# Altium PCB FLYBACK 220-24V.PcbDoc
Units mm, origin at the board's own origin, x right, y up, seen from the top; angles counter-clockwise.
Board outline 121.79 x 85.72 mm, 2 copper layers (Top Layer, Bottom Layer); 43 components, 29 nets, 113 pads, 0 vias.
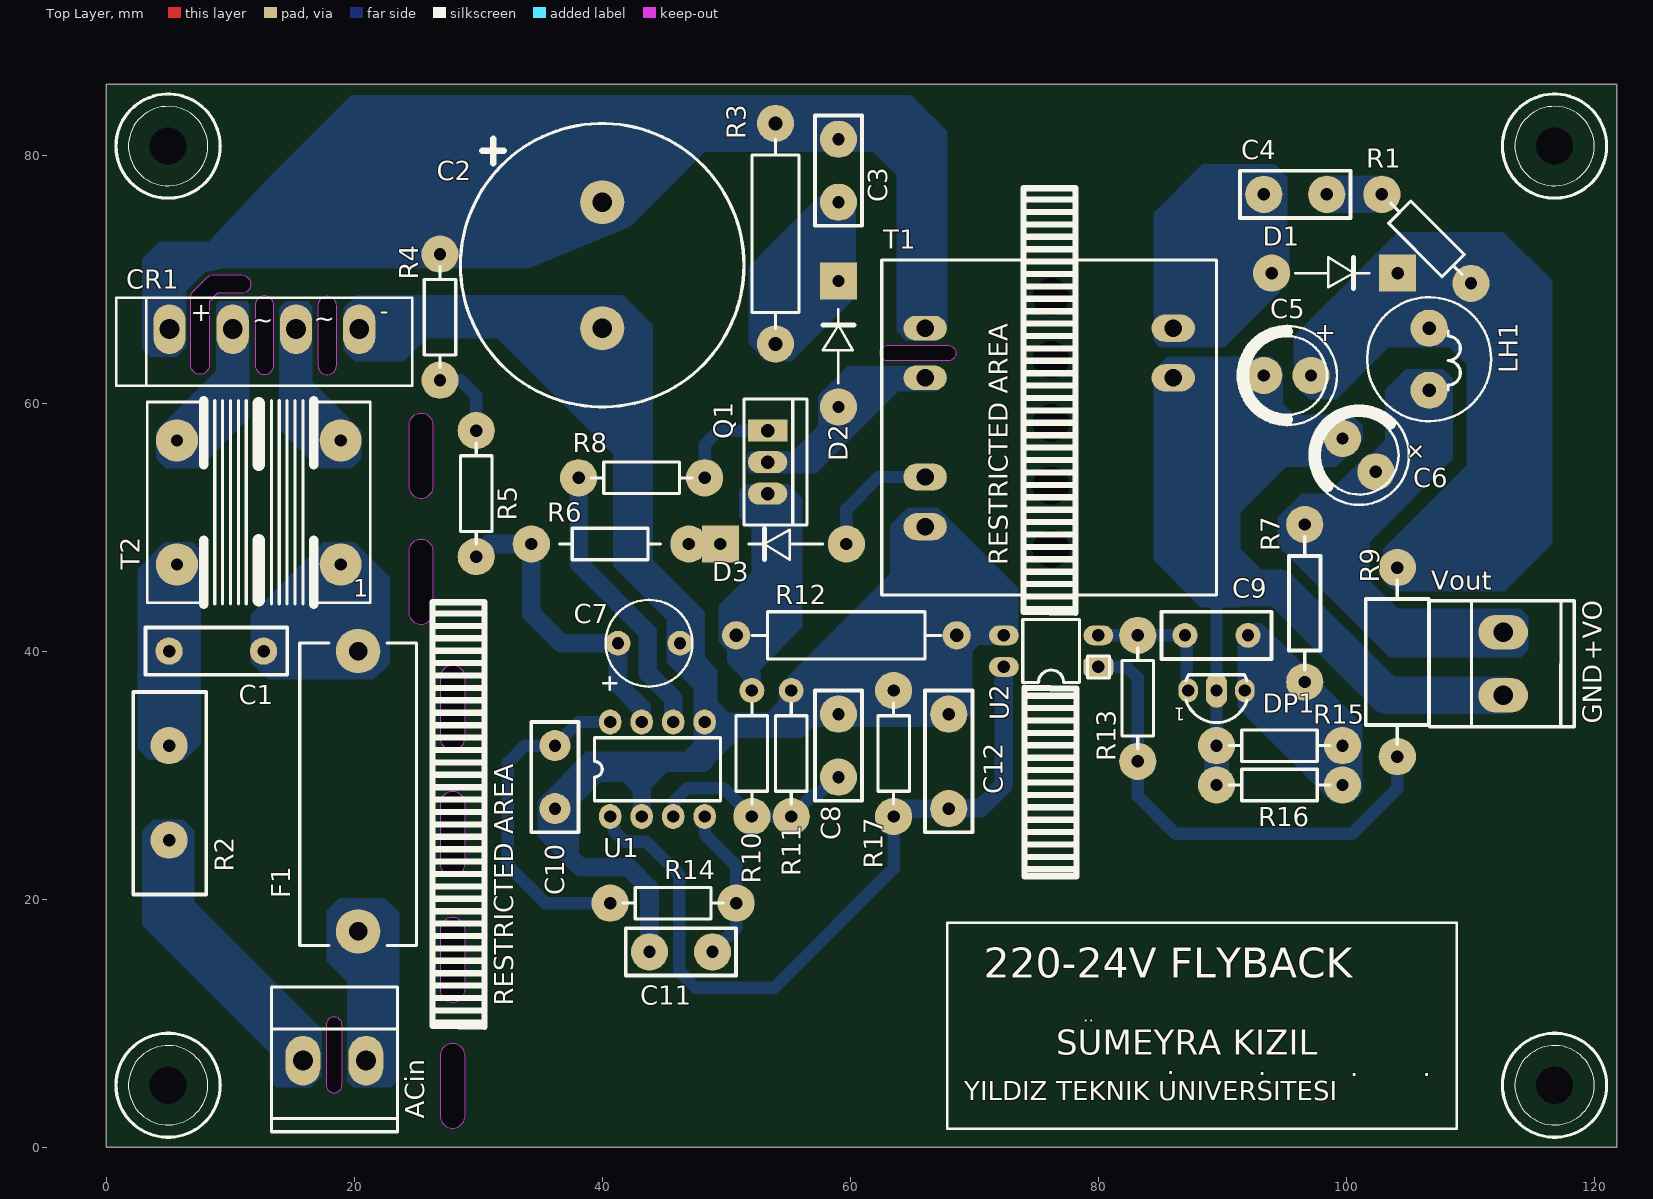
[diagram p0: Top Layer view]
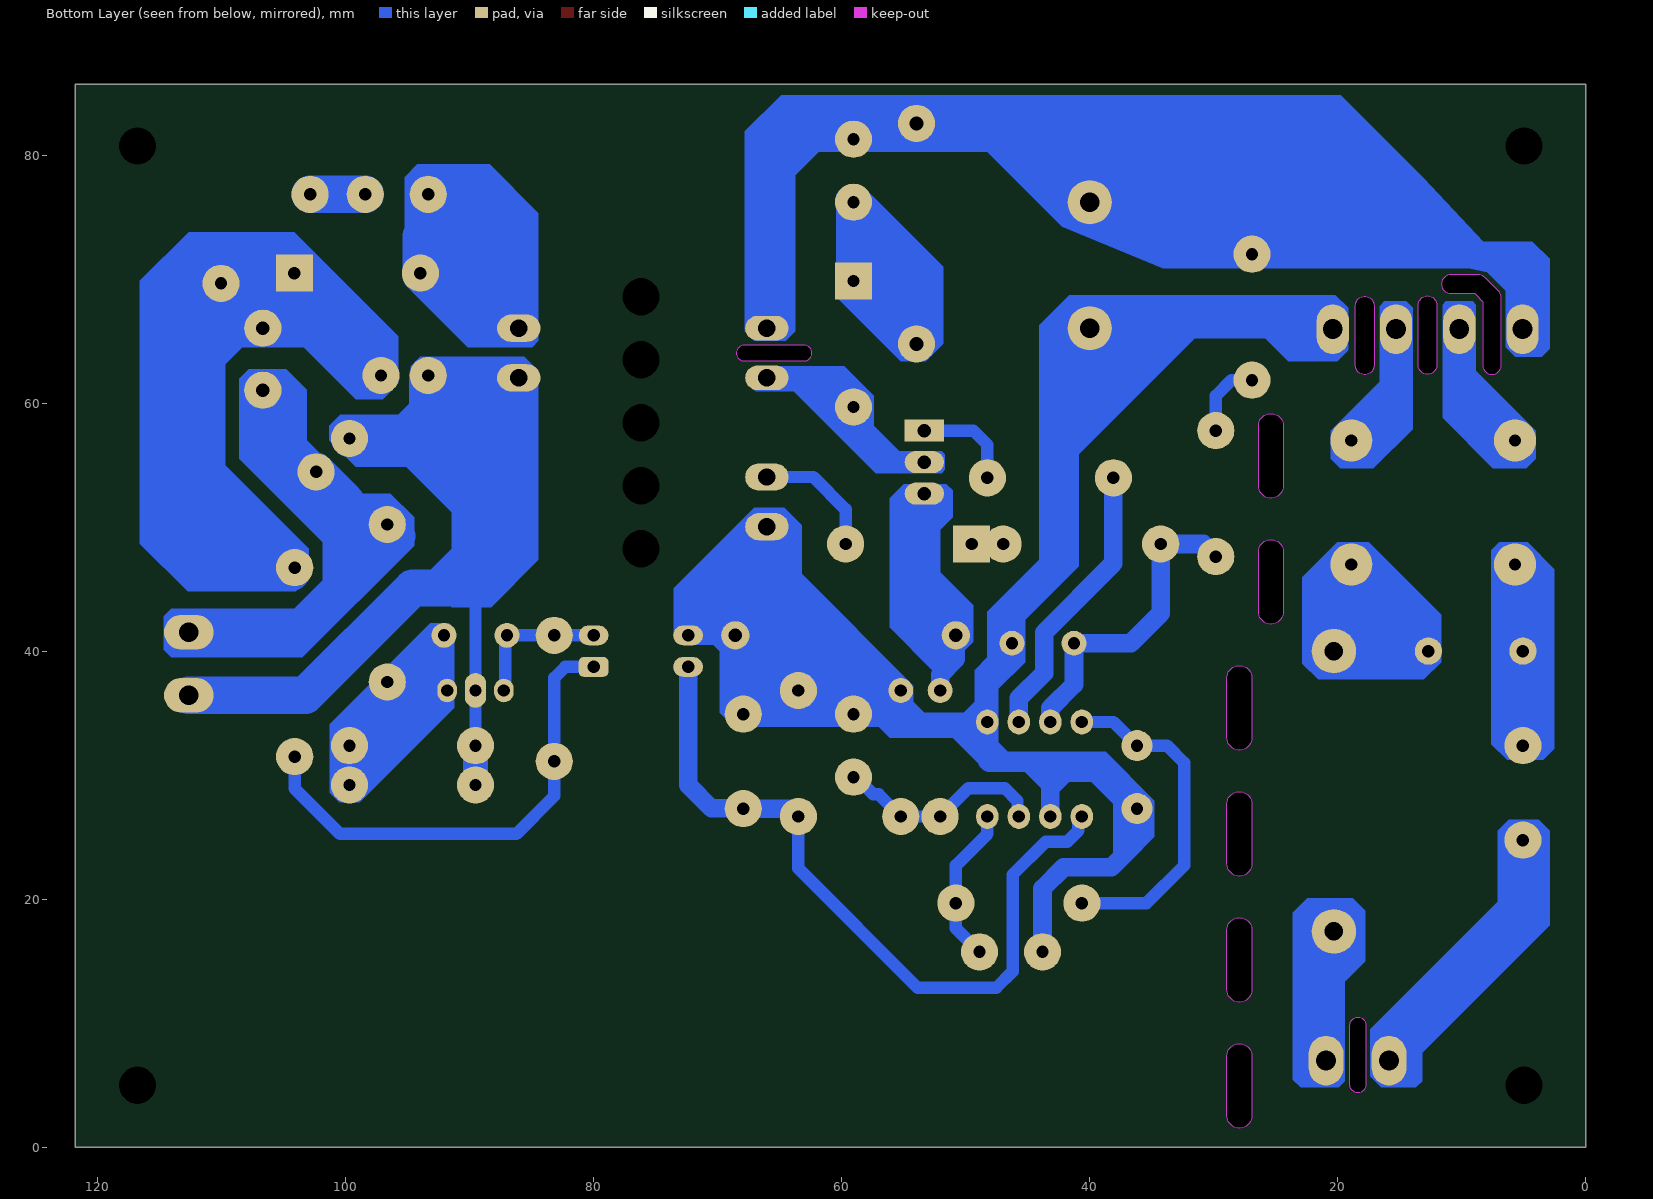
[diagram p1: Bottom Layer view, seen from below]

## Layer stack, top to bottom
Top Solder: solder mask 0.0102, Solder Resist, Dk 3.5
Top Layer: signal copper 0.0356
Dielectric 1: dielectric 0.32, FR-4, Dk 4.8
Bottom Layer: signal copper 0.0356
Bottom Solder: solder mask 0.0102, Solder Resist, Dk 3.5

## Board outline
0,0 0,85.725 121.793,85.725 121.793,0
cut-out: 17.754,5.029 ccw(c18.39,5.029) 19.025,5.029 19.025,9.855 ccw(c18.39,9.855) 17.754,9.855
cut-out: 63.043,63.398 cw(c63.043,64.033) 63.043,64.669 67.869,64.669 cw(c67.869,64.033) 68.504,64.033 cw(c67.869,64.033) 67.869,63.398
cut-out: 6.819,63.068 6.819,68.498 cw(c7.569,68.498) 7.039,69.029 7.038,69.029 8.136,70.127 ccw(c8.667,69.596) 8.136,70.126 8.136,70.127 cw(c8.667,69.596) 8.667,70.346 10.897,70.346 cw(c10.897,69.596) 11.647,69.596 cw(c10.897,69.596) 10.897,68.846 8.978,68.846 8.32,68.188 8.32,63.068 cw(c7.569,63.068)
cut-out: 17.08,63.043 ccw(c17.831,63.043) 18.581,63.043 18.581,67.869 ccw(c17.831,67.869) 17.08,67.869
cut-out: 12.026,63.068 ccw(c12.776,63.068) 13.527,63.068 13.527,67.894 ccw(c12.776,67.894) 12.026,67.894
cut-out: 26.94,2.54 ccw(c27.94,2.54) 28.94,2.54 28.94,7.366 ccw(c27.94,7.366) 26.94,7.366
cut-out: 26.94,12.7 ccw(c27.94,12.7) 28.94,12.7 28.94,17.526 ccw(c27.94,17.526) 26.94,17.526
cut-out: 26.94,22.86 ccw(c27.94,22.86) 28.94,22.86 28.94,27.686 ccw(c27.94,27.686) 26.94,27.686
cut-out: 26.94,33.02 ccw(c27.94,33.02) 28.94,33.02 28.94,37.846 ccw(c27.94,37.846) 26.94,37.846
cut-out: 24.4,43.18 ccw(c25.4,43.18) 26.4,43.18 26.4,48.006 ccw(c25.4,48.006) 24.4,48.006
cut-out: 24.4,53.34 ccw(c25.4,53.34) 26.4,53.34 26.4,58.166 ccw(c25.4,58.166) 24.4,58.166

## Design rules (kind name [scope] priority, off if disabled: settings)
Clearance [All] p1: gap=0.254 ignorepadtopadclearanceinfootprint=FALSE except(0: Arc-Hole Track-Hole SMDPad-Hole THPad-Hole Via-Hole Fill-Hole Poly-Hole Region-Hole Text-Hole)
Height [All] p1: minheight=0 maxheight=40 prefheight=12.7
HoleSize [All] p1: absolutevalues=TRUE maxlimit=4 minlimit=0.025 maxpercent=80.000 minpercent=20.000
PolygonConnect [All] p1: connectstyle=Relief reliefconductorwidth=0.254 reliefentries=4 polygonreliefangle="90 Angle" airgapwidth=0.254
RoomDefinition "FLYBACK 220-24V" [InComponentClass('FLYBACK 220-24V')] p1: confinementstyle=ConfineIn formatcopy=TRUE lockcomponents=FALSE outline -8.56,-7.087 129.515,-7.087 129.515,93.294 -8.56,93.294
RoutingVias [All] p1: holewidth=0.711 width=1.27 viastyle="Through Hole" minholewidth=0.711 minwidth=1.27 maxholewidth=0.711 maxwidth=1.27
SolderMaskExpansion [All] p1: expansion=0.102 istentingtop=FALSE
Width [All] p1: maxlimit=4 minlimit=0.254 preferedwidth=0.254
28 further rules are at their usual default settings.

## Components (designator, comment, footprint, x,y, rotation, side; value= is the part's Value field where it differs from the comment)
ACin "CONX" MBDK122 20.955,6.985 r180 top
C1 "CM03Y10N0V400" RAD0.3#1 12.7,40.005 r180 top value=10N400V
C2 "CA22X100U350" 24X30 40.005,76.2 r270 top locked value=68U350
C3 "CM02Y10N0V400" RAD0.2#1 59.055,76.2 r90 top value=10N400V
C4 "CM02Y47N0V63" RAD0.2#1 93.345,76.835 r0 top value=47N63
C5 "CA22X220U35" 8X12XP150 97.155,62.23 r180 top value=220U35
C6 "CA22X47U50" 8X12XP150 102.389,54.456 r135 top value=47U50
C7 "CA22X47U50" 6.3X11 41.275,40.64 r0 top value=47U50
C8 "CB02X3N30" RAD0.2#1 59.055,34.925 r270 top value=3N3
C9 "CB02X1N50" RAD0.2#2 86.995,41.275 r0 top value=1.5N100V
C10 "CB02X3N30" RAD0.2#3 36.195,27.305 r90 top value=3N3
C11 "CM02Y2N20V63" RAD0.2#1 43.815,15.748 r0 top value=2.2N63V
C12 "CHC0805-10N0" RAD0.3#2 67.945,34.925 r270 top value=10nF
CR1 "2KBP02" KBU 5.111,65.964 r180 top
D1 "UF5402" DO-41 93.98,70.485 r270 top
D2 "UF4007" DO-41 59.055,59.69 r0 top
D3 "UF4007" DO-41 59.69,48.641 r90 top
DP1 "TL431CZ1" TL431 87.249,36.83 r180 top
F1 "" "Sigorta Tutucu" 20.32,17.405 r90 top
LH1 "10uH" 10X13L 106.68,66.04 r270 top value=2mH (schematic designator "LH 10uH")
Q1 "10N60NZ" TO220 53.34,57.785 r270 top
R1 "RF24-47R0" AXIAL0.4#1 102.87,76.835 r315 top value=47R
R2 "MF72-5D5" RAD0.3NTC 5.08,24.765 r90 top
R3 "RF13-47K0" AXIAL0.7#1 53.975,64.77 r90 top value="47K 2W"
R4 "CHR1206-15R0" AXIAL0.4#1 26.924,61.849 r90 top value=150K
R5 "CHR1206-15R0" AXIAL0.4#1 29.845,47.625 r90 top value=150K
R6 "CHR1206-15R0" AXIAL0.5 34.29,48.641 r0 top value=15R
R7 "RF24-39K0" AXIAL0.5 96.647,37.516 r90 top value=39K
R8 "RF24-15R0" AXIAL0.4#1 38.1,53.975 r0 top value=15R
R9 "RF24-270R" AXIAL0.6 104.115,31.496 r90 top value=270R
R10 "RF24-1K00" AXIAL0.4#2 52.07,26.67 r90 top value=1K
R11 "RF24-2K20" AXIAL0.4#3 55.245,36.83 r270 top value=2K2
R12 "RW02J-2R20" AXIAL0.7#2 68.58,41.275 r180 top locked value="2R2 J 2W"
R13 "RF24-1K00" AXIAL0.4#1 83.185,41.275 r270 top value=1K
R14 "RF24-6K80" AXIAL0.4#1 40.64,19.685 r0 top value=6K8
R15 "RF24-4K70" AXIAL0.4#1 89.535,32.385 r0 top value=4K7
R16 "RF24-130K" AXIAL0.4#1 89.535,29.21 r0 top value=130K
R17 "CHR0805-10K0" AXIAL0.4#1 63.5,36.83 r270 top
T1 "EF25" TRF_EF25_40 66.04,66.04 r0 top
T2 "UU9.8" LFILT11 18.915,46.99 r0 top
U1 "UC3842D" DIP8 40.64,26.67 r90 top
U2 "HCPL817" DIP4 80.01,38.735 r180 top
Vout "CONX" MBDK122 112.649,41.529 r270 top

## Footprints (in the part's own frame and the unit in brackets; to place one, negate y for a bottom-side part, rotate by r counter-clockwise, add the part's x,y. Pads: shape width x height; smd on the part's side, far side on the other; paste and mask are expansions set on the pad)
6.3X11 [mm]
  round 2 hole 1: 1(0,0) 2(5,0)
  silkscreen extent -1.2,-3.74 6,3.5
8X12XP150 [mm]
  round 3 hole 1: 1(0,0) 2(3.81,0)
  silkscreen extent -2.09,-4 5.91,4
10X13L [mm] "Coilcraft-RFC0807C"
  round 3 hole 1.1: 1(0,0) 2(5,0)
  silkscreen extent -2.5,-5 7.5,5, body extent -1.86,-4.4 6.94,4.4, height 7.7
24X30 [mil]
  round 140 hole 62.99: 1(0,0) 2(400,0)
  silkscreen extent -250,-450 650,450, body extent -472,-672 872,672, height 1181
AXIAL0.4#1 [mm]
  round 3 hole 1: 1(0,0) 2(10.16,0)
  silkscreen extent 1.02,-1.27 9.14,1.27
AXIAL0.4#2 [mm]
  round 3 hole 1: 1(0,0)
  round 2 hole 1: 2(10.16,0)
  silkscreen extent 1.02,-1.27 9.14,1.27
AXIAL0.4#3 [mm]
  round 2 hole 1: 1(0,0)
  round 3 hole 1: 2(10.16,0)
  silkscreen extent 1.02,-1.27 9.14,1.27
AXIAL0.5 [mm]
  round 3 hole 1: 1(0,0) 2(12.7,0)
  silkscreen extent 2.29,-1.27 10.41,1.27
AXIAL0.6 [mm]
  round 3 hole 1: 1(0,0) 2(15.24,0)
  silkscreen extent 1.02,-2.54 14.22,2.54, body extent -0.25,-2.25 15.45,2.25, height 4.84
AXIAL0.7#1 [mm]
  round 3 hole 1.1: 1(0,0) 2(17.78,0)
  silkscreen extent 1.27,-1.91 16.51,1.91, body extent -0.4,-3 18.18,3, height 7.49
AXIAL0.7#2 [mm]
  round 2.286 hole 1.1: 1(0,0) 2(17.78,0)
  silkscreen extent 1.27,-1.9 16.51,1.91, body extent -0.4,-3 18.18,3, height 7.49
DIP4 [mm]
  rrect50% 2.4x1.6 hole 1: 1(0,0)
  oval 2.4x1.6 hole 1: 2(0,-2.54) 3(7.62,-2.54) 4(7.62,0)
  silkscreen extent -0.89,-3.81 6.1,1.27, body extent -0.13,-3.57 7.75,1.03, height 4.42
DIP8 [mm]
  oval 2x1.8 hole 1: 1(0,0) 2(0,-2.54) 3(0,-5.08) 4(0,-7.62) 5(7.62,-7.62) 6(7.62,-5.08) 7(7.62,-2.54) 8(7.62,0)
  silkscreen extent 1.27,-8.89 6.35,1.27
DO-41 [mm]
  round 3 hole 1: 1(0,0)
  rect 3x3 hole 1: 2(0,10.16)
  silkscreen extent -1.27,1.91 1.27,7.87
KBU [mm]
  oval 2.6x4 hole 1.6: 1(0,0) 2(-5.1,0) 3(-10.2,0) 4(-15.3,0)
  silkscreen extent -19.59,-2.54 4.29,4.57, body extent -19.35,-2.5 3.85,4.45, height 22.65
LFILT11 [mm]
  round 3.4 hole 1: 1(0,0) 2(-13.2,0) 3(0,10) 4(-13.2,10)
  silkscreen extent -15.6,-3.2 2.4,13.2, body extent -15.75,-3.05 2.54,13.01, height 15.32
MBDK122 [mm]
  oval 2.8x4 hole 1.6: 1(0,0) 2(5.08,0)
  silkscreen extent -2.54,-5.95 7.62,5.73
RAD0.2#1 [mm]
  round 3 hole 1: 1(0,0) 2(5.08,0)
  silkscreen extent -1.91,-1.91 6.98,1.91
RAD0.2#2 [mm]
  round 2 hole 1: 1(0,0) 2(5.08,0)
  silkscreen extent -1.91,-1.91 6.98,1.91
RAD0.2#3 [mm]
  round 2.5 hole 1: 1(0,0) 2(5.08,0)
  silkscreen extent -1.9,-1.91 6.99,1.91
RAD0.3#1 [mm]
  round 2.2 hole 1: 1(0,0) 2(7.62,0)
  silkscreen extent -1.91,-1.91 9.53,1.91, body extent -2.06,-2.06 9.68,2.06, height 10.16
RAD0.3#2 [mm]
  round 3 hole 1: 1(0,0) 2(7.62,0)
  silkscreen extent -1.91,-1.91 9.53,1.91, body extent -2.06,-2.06 9.68,2.06, height 10.16
RAD0.3NTC [mm]
  round 3 hole 1: 1(0,0) 2(7.62,0)
  silkscreen extent -4.39,-3 11.94,2.9, body extent -4.24,-2.83 11.76,2.77, height 22.83
"Sigorta Tutucu" [mm]
  round 3.6 hole 1.5: 1(0,0) 2(22.6,0)
  silkscreen extent -1.14,-4.7 23.26,4.7, body extent -0.77,-4.85 23.38,4.85, height 10.79
TL431 [mil]
  oval 62x75 hole 39.37: 1(0,0) 3(-180,0)
  oval 68x110 hole 39.37: 2(-90,0)
  silkscreen extent -187,-50 7,102
TO220 [mm]
  rect 1.778x3.175 hole 1.1: 1(0,0)
  oval 1.778x3.175 hole 1.1: 2(2.54,0) 3(5.08,0)
  silkscreen extent -2.54,-1.91 7.62,3.18
TRF_EF25_40 [mm]
  oval 3.5x2 hole 1.4: 1(0,0) 2(0,-4)
  oval 3.5x2.2 hole 1.4: 4(0,-12) 5(0,-16) 9(20,-4) 10(20,0)
  silkscreen extent -3.5,-21.5 23.5,5.5

## Part data
ACin Vout: library part CON2X, "X PIN CONN"
C1 C3 C4 C11: "METALLISED POLYSTER CAP", Manufacturer="Generic Components", Class=Passive, Published=08/06/2000, Publisher=NET, SubClass="METALLISED POLYSTER CAP"
C2: library part CA22X68U350, "Electrolytic Capacitor general use", Manufacturer="Generic Components", Class=Passive, SubClass=Capacitor
C5 C6 C7: "Electrolytic Capacitor general use", Manufacturer="Generic Components", Class=Passive, SubClass=Capacitor
C8 C9 C10: "CERAMIC DISC CAPACITOR", Manufacturer="Generic Components", Class=Passive, Published=12/03/04, Publisher="Nettas Technology Center", SubClass=Capacitor
C12: "TH Capacitor", Manufacturer="Generic Components", Class=Passive, Published=22/12/2003, Publisher="Nettas Technology Center", SubClass=Capacitor
CR1: "2 Amp Single Phase Rectifier Bridge", Manufacturer="International Rectifier", Class=Discrete, Published=8/06/2000, Publisher="Altium Hobart Technology Centre", SubClass="Rectifier - Bridge"
D1 D2 D3: "General Purpose ULTRA FAST Rectifiers", Manufacturer="Generic Components", Class=Discrete, Published=08/06/2000, Publisher="Altium Hobart Technology Centre"
DP1: "Programmable Voltage Reference", Manufacturer=ST-Microelectronics, Class="Power Management", Published=24/08/2001, Publisher="Altium Hobart Technology Centre", SubClass="Voltage Reference"
F1: library part FUSE-GL600, "Fuse", Manufacturer="Generic Components", Class=Passive, Published=08/06/2000, Publisher="Altium Hobart Technology Centre", SubClass=Fuse
LH1: library part Inductor, "LH 10uH", Manufacturer="Generic Components", Class=Passive, Published=08/06/2000, Publisher="Altium Hobart Technology Centre", SubClass=Inductor
Q1: "FULLY AUTOPROTECTED POWER MOSFET", Manufacturer="Generic Components", Class=Discrete, Published=08/06/2000, Publisher="Altium Hobart Technology Centre", SubClass="MOSFET - Low Power"
R1: "AXIAL Resistor 0.4", Manufacturer="Generic Components", Class=Passive, Published=22/12/2003, Publisher="Nettas Technology Center", SubClass=Resistor
R2: "Power NTC Thermistor", Manufacturer="Generic Components", Class=Passive, Published=22/12/2003, Publisher="Nettas Technology Center", SubClass=Resistor
R3: "AXIAL Resistor 0.7", Manufacturer="Generic Components", Class=Passive, Published=22/12/2003, Publisher="Nettas Technology Center", SubClass=Resistor
R4 R5 R6: "SMD Resistor", Manufacturer="Generic Components", Class=Passive, Published=22/12/2003, Publisher="Nettas Technology Center", SubClass=Resistor
R7 R8 R9 R10 R11 R13 R14 R15 R16: "AXIAL Resistor", Manufacturer="Generic Components", Class=Passive, Published=22/12/2003, Publisher="Nettas Technology Center", SubClass=Resistor
R12: "AXIAL WIRE Resistor", Manufacturer="Generic Components", Class=Passive, Published=22/12/2003, Publisher="Nettas Technology Center", SubClass=Resistor
R17: "TH Resistor", Manufacturer="Generic Components", Class=Passive, Published=22/12/2003, Publisher="Nettas Technology Center", SubClass=Resistor
T1: library part TRF_EF25_40, "TRF_EF25_40", Manufacturer="Generic Components", Class=Passive, Published=08/06/2000, Publisher="Altium Hobart Technology Centre", SubClass=Transformer
T2: library part LINEFILTER12, "LINEFILTER CUPL TRF"
U1: library part UC3844D1, "SMPS Controller"
U2: "High Density Mounting Type Photocoupler", Class=Optoelectronic, Manufacturer=www.cosmo-ic.com, Published=2004

## Free pads (board coordinates)
  round 0 hole 3 unplated: 12(5,5) 12(5,80.725) 12(76.2,48.26) 12(76.2,53.34) 12(76.2,58.42) 12(76.2,63.5) 12(76.2,68.58) 12(116.793,80.725) 12(116.793,5)

## Nets (pads, with @x,y where several pads share a name; then routed paths per layer and width w, separated by ;. In a path a pad name is that pad's centre, name@x,y a point inside that pad or via, vN(x,y) a via of type N, cw(c..) or ccw(c..) an arc to the next point about the centre after c; other vN are vias at no path point)
GND: C5.2 C6.2 DP1.2 R15.1 R16.1 T1.9 Vout.2 | length 66.5
  Bottom Layer w1: R15.1 DP1.2 89.535,45.085 89.535,48.26 ; 89.535,48.387 89.535,51.054
  Bottom Layer w2: R16.1 R15.1
  Bottom Layer w3: T1.9 86.175,62.04 86.365,62.23 C5.2 93.411,62.164 93.411,58.989 95.25,57.15 C6.2 ; 89.535,45.847 90.297,45.085 94.615,45.085 103.251,36.449 Vout.2 ; 89.535,48.26 89.535,48.387
GNDS: C2.2 C7.2 C8.1 C10.1 C11.1 C12.1 CR1.4 R11.1 R12.1 R17.1 T1.5 U1.2 U1.5 U2.3 | length 139
  Bottom Layer w1.5: CR1.4 39.929,65.964 C2.2 40.005,60.96 41.656,59.309 41.656,47.854 46.275,43.235 C7.2 46.275,39.958 48.26,37.973 U1.5 ; U1.2 43.18,30.861 ; C11.1 43.815,17.145 43.815,20.863 42.104,22.573 38.26,22.573 36.248,24.585 36.248,27.252 C10.1 39.751,30.861 43.18,30.861 ; T1.5 66.04,43.815 R12.1 ; U2.3 R12.1 ; 43.18,30.861 43.307,30.988 48.133,30.988 48.26,31.115 U1.5 ; U1.5 55.245,34.29 R11.1 57.15,34.925 C8.1 61.087,36.957 63.373,36.957 R17.1 68.072,36.83 67.945,36.703 67.945,35.56 C12.1 68.58,35.56 68.58,36.703 R12.1
NetACin_1: ACin.1 F1.1 | length 11.2
  Bottom Layer w1.5: F1.1 20.722,17.003 20.722,15.71 20.955,15.476 ACin.1@20.955,6.432
NetACin_2: ACin.2 R2.1 | length 22.3
  Bottom Layer w1.5: R2.1 5.08,19.685 15.614,9.151 15.614,7.246 ACin.2
NetC1_1: C1.1 F1.2 T2.1 | length 15.2
  Bottom Layer w1.5: C1.1 F1.2 20.32,45.585 T2.1
NetC1_2: C1.2 R2.2 T2.2 | length 14.7
  Bottom Layer w1.5: C1.2@4.953,40.259 4.953,46.228 T2.2 ; R2.2 C1.2
NetC2_1: C2.1 C3.2 CR1.1 R3.2 R4.2 T1.1 | length 84.9
  Bottom Layer w1.5: CR1.1 5.111,69.373 7.747,72.009 9.017,72.009 10.033,73.025 25.908,73.025 R4.2 ; R4.2@26.891,71.976 31.115,76.2 C2.1 46.355,82.55 R3.2 57.785,82.55 C3.2 63.373,81.28 66.04,78.613 T1.1
NetC3_1: C3.1 D2.2 R3.1 | length 16
  Bottom Layer w1.5: R3.1 53.975,68.971 54.854,69.85 D2.2 C3.1
NetC4_1: C4.1 D1.1 T1.10 | length 16.4
  Bottom Layer w3: T1.10 90.485,70.485 D1.1 93.927,70.538 93.927,73.459 93.398,73.988 93.398,76.782 C4.1
NetC4_2: C4.2 R1.1 | length 4.4
  Bottom Layer w3: C4.2 R1.1
NetC5_1: C5.1 D1.2 LH1.1 R1.2 R9.2 | length 49.2
  Bottom Layer w3: C5.1@97.285,62.23 101.095,66.04 104.14,66.04 ; R9.2@104.394,46.355 112.395,54.356 112.395,62.992 109.4,65.987 106.733,65.987 LH1.1 104.14,66.04 ; R1.2@110.998,70.485 D1.2 104.14,66.04
NetC6_1: C6.1 LH1.2 R7.2 Vout.1 | length 38.1
  Bottom Layer w3: R7.2@95.885,49.276 100.003,49.276 ; LH1.2 106.68,56.388 104.84,54.548 102.481,54.548 C6.1 100.003,52.07 100.003,49.276 ; Vout.1 103.886,41.529 100.003,45.412 100.003,49.276
NetC7_1: C7.1 R5.1 R6.1 U1.7 | length 25.6
  Bottom Layer w1.5: R5.1 30.861,48.641 R6.1 34.29,43.053 36.703,40.64 C7.1 41.275,37.31 43.18,35.405 U1.7
NetC8_2: C8.2 R10.1 R11.2 U1.3 | length 17.2
  Bottom Layer w1: U1.3 45.83,26.78 45.83,27.923 46.863,28.956 49.784,28.956 R10.1 R11.2 57.023,28.448 57.447,28.448 58.844,29.845 C8.2
NetC9_1: C9.1 DP1.1 R13.1 U2.2 | length 11.5
  Bottom Layer w1: U2.2 R13.1 C9.1 87.139,41.131 87.139,36.94 DP1.1
NetC9_2: C9.2 DP1.3 R7.1 R15.2 R16.2 | length 23
  Bottom Layer w1: C9.2 91.931,41.131 91.931,36.94 DP1.3 ; R7.1 94.412,37.516 93.726,36.83 DP1.3 ; R16.2 R15.2 95.504,32.385 94.234,33.655 94.234,34.417 92.273,36.378 92.264,36.378 91.821,36.82 DP1.3
NetC10_2: C10.2 R14.1 U1.8 | length 27.4
  Bottom Layer w1: R14.1 35.433,19.685 32.385,22.733 32.385,30.988 33.782,32.385 C10.2 38.1,34.29 U1.8
NetC11_2: C11.2 R14.2 U1.4 | length 12.8
  Bottom Layer w1: U1.4 48.26,25.273 50.8,22.733 R14.2 50.8,17.653 C11.2
NetC12_2: C12.2 R17.2 U1.1 U2.4 | length 61.3
  Bottom Layer w1: U1.1 40.927,26.383 40.927,25.537 41.835,24.629 43.57,24.629 46.228,21.971 46.228,14.175 47.545,12.858 53.879,12.858 63.5,22.479 R17.2
  Bottom Layer w1.5: R17.2 63.527,26.67 64.162,27.305 C12.2 67.959,27.319 70.499,27.319 72.39,29.21 U2.4
NetCR1_2: CR1.2 T2.4 | length 10.8
  Bottom Layer w1.5: T2.4 10.211,61.486 CR1.2
NetCR1_3: CR1.3 T2.3 | length 10.5
  Bottom Layer w1.5: CR1.3 15.311,60.594 T2.3
NetD2_1: D2.1 Q1.2 T1.2 | length 16.2
  Bottom Layer w1.5: Q1.2 55.753,55.245 59.055,58.547 D2.1 61.405,62.04 T1.2
NetD3_1: D3.1 T1.4 | length 10.2
  Bottom Layer w1: D3.1 59.69,51.435 62.295,54.04 T1.4
NetD3_2: D3.2 R6.2 | length 2.5
  Bottom Layer w1.5: R6.2 D3.2
NetQ1_1: Q1.1 R8.2 | length 8.2
  Bottom Layer w1: R8.2 48.26,56.642 49.403,57.785 Q1.1
NetQ1_3: Q1.3 R10.2 R12.2 | length 17.5
  Bottom Layer w1.5: R10.2 52.07,38.1 50.8,39.37 R12.2 53.34,43.815 Q1.3
NetR4_1: R4.1 R5.2 | length 6.2
  Bottom Layer w1: R4.1 28.575,61.849 29.845,60.579 R5.2
NetR8_1: R8.1 U1.6 | length 22.8
  Bottom Layer w1.5: R8.1 38.1,47.077 43.688,41.489 43.688,38.227 45.72,36.195 U1.6
NetR9_1: R9.1 R13.2 U2.1 | length 39.3
  Bottom Layer w1: U2.1 82.296,38.735 83.185,37.846 R13.2 83.185,28.321 86.233,25.273 100.457,25.273 104.115,28.931 R9.1

## Polygon pours and split planes (outlines as drawn)
no net on Top Overlay "NONET_L-01_P-001" (hatched Horizontal grid 1 track 0.5, remove dead copper): 26.314,9.797 26.314,43.942 30.505,43.942 30.505,9.721
no net on Top Overlay "NONET_L-01_P-001" (hatched Horizontal grid 1 track 0.5, remove dead copper): 78.245,36.97 78.245,21.844 74.054,21.844 74.054,37.046
no net on Top Overlay "NONET_L-01_P-001" (hatched Horizontal grid 1 track 0.5, remove dead copper): 73.965,43.173 73.965,77.318 78.156,77.318 78.156,43.096

## Other copper
Bottom Layer:
  region net NetC9_2: 91.237,41.783 91.237,35.433 98.857,27.813 100.533,27.813 101.295,28.575 101.295,34.112 93.167,42.24 91.694,42.24
  pour cut-out: 5,73.253 cw(c5,80.725) -2.472,80.725 cw(c5,80.725) 5,88.197 cw(c5,80.725) 12.472,80.725 cw(c5,80.725)
  region net NetQ1_3: 51.562,53.467 54.991,53.467 56.134,52.324 56.134,41.91 52.578,38.354 51.816,38.354 49.403,40.767 49.403,43.688 52.07,46.355 52.07,49.784 51.054,50.8 51.054,52.959
  region net NetD2_1: 51.943,56.134 55.372,56.134 57.404,58.166 57.404,60.579 59.817,62.992 67.056,62.992 67.564,62.484 67.564,61.595 66.929,60.96 63.881,60.96 57.277,54.356 51.943,54.356 51.689,54.61 51.689,55.88
  region net GNDS: 19.177,67.691 20.193,68.707 41.656,68.707 44.069,66.294 44.069,47.371 48.26,43.18 48.26,39.497 49.276,38.481 49.276,35.941 50.165,35.052 53.34,35.052 54.229,35.941 54.229,37.211 63.246,46.228 63.246,50.165 64.643,51.562 67.056,51.562 73.533,45.085 73.533,41.275 72.771,40.513 70.358,40.513 69.85,40.005 69.85,35.052 68.707,33.909 57.023,33.909 56.134,33.02 51.054,33.02 48.387,30.353 45.339,30.353 43.688,28.702 42.418,28.702 41.656,29.464 39.878,29.464 38.1,27.686 38.1,23.114 37.973,22.987 36.83,22.987 34.798,25.019 34.798,27.94 38.735,31.877 46.609,31.877 47.371,32.639 47.371,36.957 45.212,39.116 45.212,42.545 40.894,46.863 40.894,55.88 31.115,65.659 26.289,65.659 24.003,63.373 20.066,63.373 19.177,64.262
  region net NetC3_1: 57.912,77.089 51.816,70.993 51.816,64.77 53.213,63.373 55.245,63.373 60.452,68.58 60.452,76.835 60.198,77.089
  region net NetC2_1: 6.477,69.063 7.975,70.561 9.498,70.866 34.118,70.866 42.216,74.22 48.26,80.264 61.849,80.264 63.754,78.359 63.754,65.786 64.516,65.024 67.056,65.024 67.818,65.786 67.818,81.915 64.897,84.836 19.767,84.836 13.081,78.15 8.297,73.025 4.318,73.025 2.921,71.628 2.921,70.358 2.921,64.389 3.556,63.754 5.715,63.754 6.477,64.516 6.477,64.897
  region net NetCR1_3: 16.637,67.818 16.637,61.714 20.566,57.785 20.566,55.499 19.804,54.737 17.137,54.737 13.97,57.904 13.97,67.691 14.478,68.199 14.978,68.199 16.256,68.199
  region net NetCR1_2: 8.89,67.945 8.89,62.611 4.064,57.785 4.064,55.499 4.826,54.737 7.493,54.737 11.557,58.801 11.557,67.945 11.303,68.199 9.652,68.199 9.144,68.199
  region net NetC1_1: 17.526,48.768 11.684,42.926 11.684,39.116 13.081,37.719 21.59,37.719 22.86,38.989 22.86,45.974 20.066,48.768
  region net NetC1_2: 4.699,48.768 2.54,46.609 2.54,32.131 3.429,31.242 6.35,31.242 7.62,32.512 7.62,48.133 6.985,48.768
  region net NetACin_1: 19.431,13.335 17.78,14.986 17.78,19.05 18.796,20.066 22.479,20.066 23.622,18.923 23.622,5.461 22.987,4.826 19.939,4.826 19.431,5.334
  region net NetACin_2: 6.223,26.416 3.81,26.416 2.921,25.527 2.921,17.907 13.208,7.62 13.208,5.334 13.716,4.826 16.51,4.826 17.399,5.715 17.399,9.525 7.112,19.812 7.112,25.527
  region net NetC6_1: 104.775,62.738 107.823,62.738 108.585,61.976 108.585,55.499 101.854,48.768 101.854,45.72 104.14,43.434 114.046,43.434 114.681,42.799 114.681,40.132 114.046,39.497 103.505,39.497 94.488,48.514 94.488,50.8 96.393,52.705 98.806,52.705 103.124,57.023 103.124,61.087
  region net NetC5_1: 108.458,73.787 104.14,73.787 95.758,65.405 95.758,61.595 97.028,60.325 99.187,60.325 103.378,64.516 108.331,64.516 109.728,63.119 109.728,54.991 102.997,48.26 102.997,45.847 104.013,44.831 112.751,44.831 116.586,48.666 116.586,69.85 112.649,73.787
  region net NetC4_1: 84.455,65.024 84.455,75.311 88.392,79.248 94.234,79.248 95.25,78.232 95.25,69.596 90.17,64.516 84.963,64.516
  region net GND: 85.598,63.754 93.98,63.754 94.742,62.992 94.742,60.071 95.758,59.055 100.457,59.055 101.346,58.166 101.346,57.023 99.187,54.864 95.123,54.864 91.44,51.181 91.44,48.26 93.408,46.291 91.44,43.561 88.265,43.561 84.455,47.371 84.455,62.611

## Silkscreen, mask and mechanical layers (free items; w line width, h text height)
Top Overlay:
  circle w0.1: c5,80.725 r3.2
  circle w0.254: c116.793,5 r4.2
  circle w0.1: c116.793,5 r3.2
  circle w0.254: c116.793,80.725 r4.2
  circle w0.1: c116.793,80.725 r3.2
  circle w0.254: c5,80.725 r4.2
  circle w0.1: c5,5 r3.2
  circle w0.254: c5,5 r4.2
  lines w0.2: 67.843,1.473 67.843,18.11 108.89,18.11 108.89,1.473 67.843,1.473
  text "RESTRICTED AREA" at 72.72,46.914 h1.52 r90
  text "+VO" at 120.599,39.218 h1.52 r90
  text "GND" at 120.599,34.138 h1.52 r90
  text "220-24V FLYBACK" at 70.758,13.659 h2.4
  text "RESTRICTED AREA" at 32.817,11.405 h1.52 r90
  text ".." at 78.81,10.103 h1
  text "SUMEYRA KIZIL" at 76.6,7.461 h2
  text "." at 85.522,5.867 h1.52
  text "." at 92.888,5.791 h1.52
  text "." at 100.33,5.74 h1.52
  text "." at 106.172,5.74 h1.52
  text "YILDIZ TEKNIK UNIVERSITESI" at 69.215,3.81 h1.52
Mechanical 1:
  lines w0.25: 0,0 0,85.725 121.793,85.725 121.793,0 0,0
  lines w1.27: 18.39,5.029 18.39,9.855 ; 63.043,64.033 67.869,64.033
  lines w1.5: 7.569,63.068 7.569,68.498 8.667,69.596 10.897,69.596 ; 12.776,63.068 12.776,67.894 ; 17.831,63.043 17.831,67.869
  lines w2: 25.4,43.18 25.4,48.006 ; 25.4,53.34 25.4,58.166 ; 27.94,2.54 27.94,7.366 ; 27.94,12.7 27.94,17.526 ; 27.94,22.86 27.94,27.686 ; 27.94,33.02 27.94,37.846

## Text inside footprints (layer, text, board x,y; h text height)
C5: Top Overlay "+" at 99.171,66.294 h1.52 r180
C6: Top Overlay "+" at 106.688,55.905 h1.52 r135
CR1: Top Overlay "-" at 22.062,66.726 h1.5; Top Overlay "+" at 6.822,66.599 h1.5; Top Overlay "~" at 11.775,65.964 h1.5; Top Overlay "~" at 16.728,66.091 h1.5
DP1: Top Overlay "1" at 86.995,35.433 h1.02 r180
T2: Top Overlay "1" at 19.935,44.37 h1.42